# Altium PCB MultiRotor.PcbDoc
Units mil, origin at the board's own origin, x right, y up, seen from the top; angles counter-clockwise.
Board outline 1840 x 1456 mil, 2 copper layers (Top Layer, Bottom Layer); 44 components, 42 nets, 162 pads, 12 vias.
Unrouted connection lines stored in the file: 10.
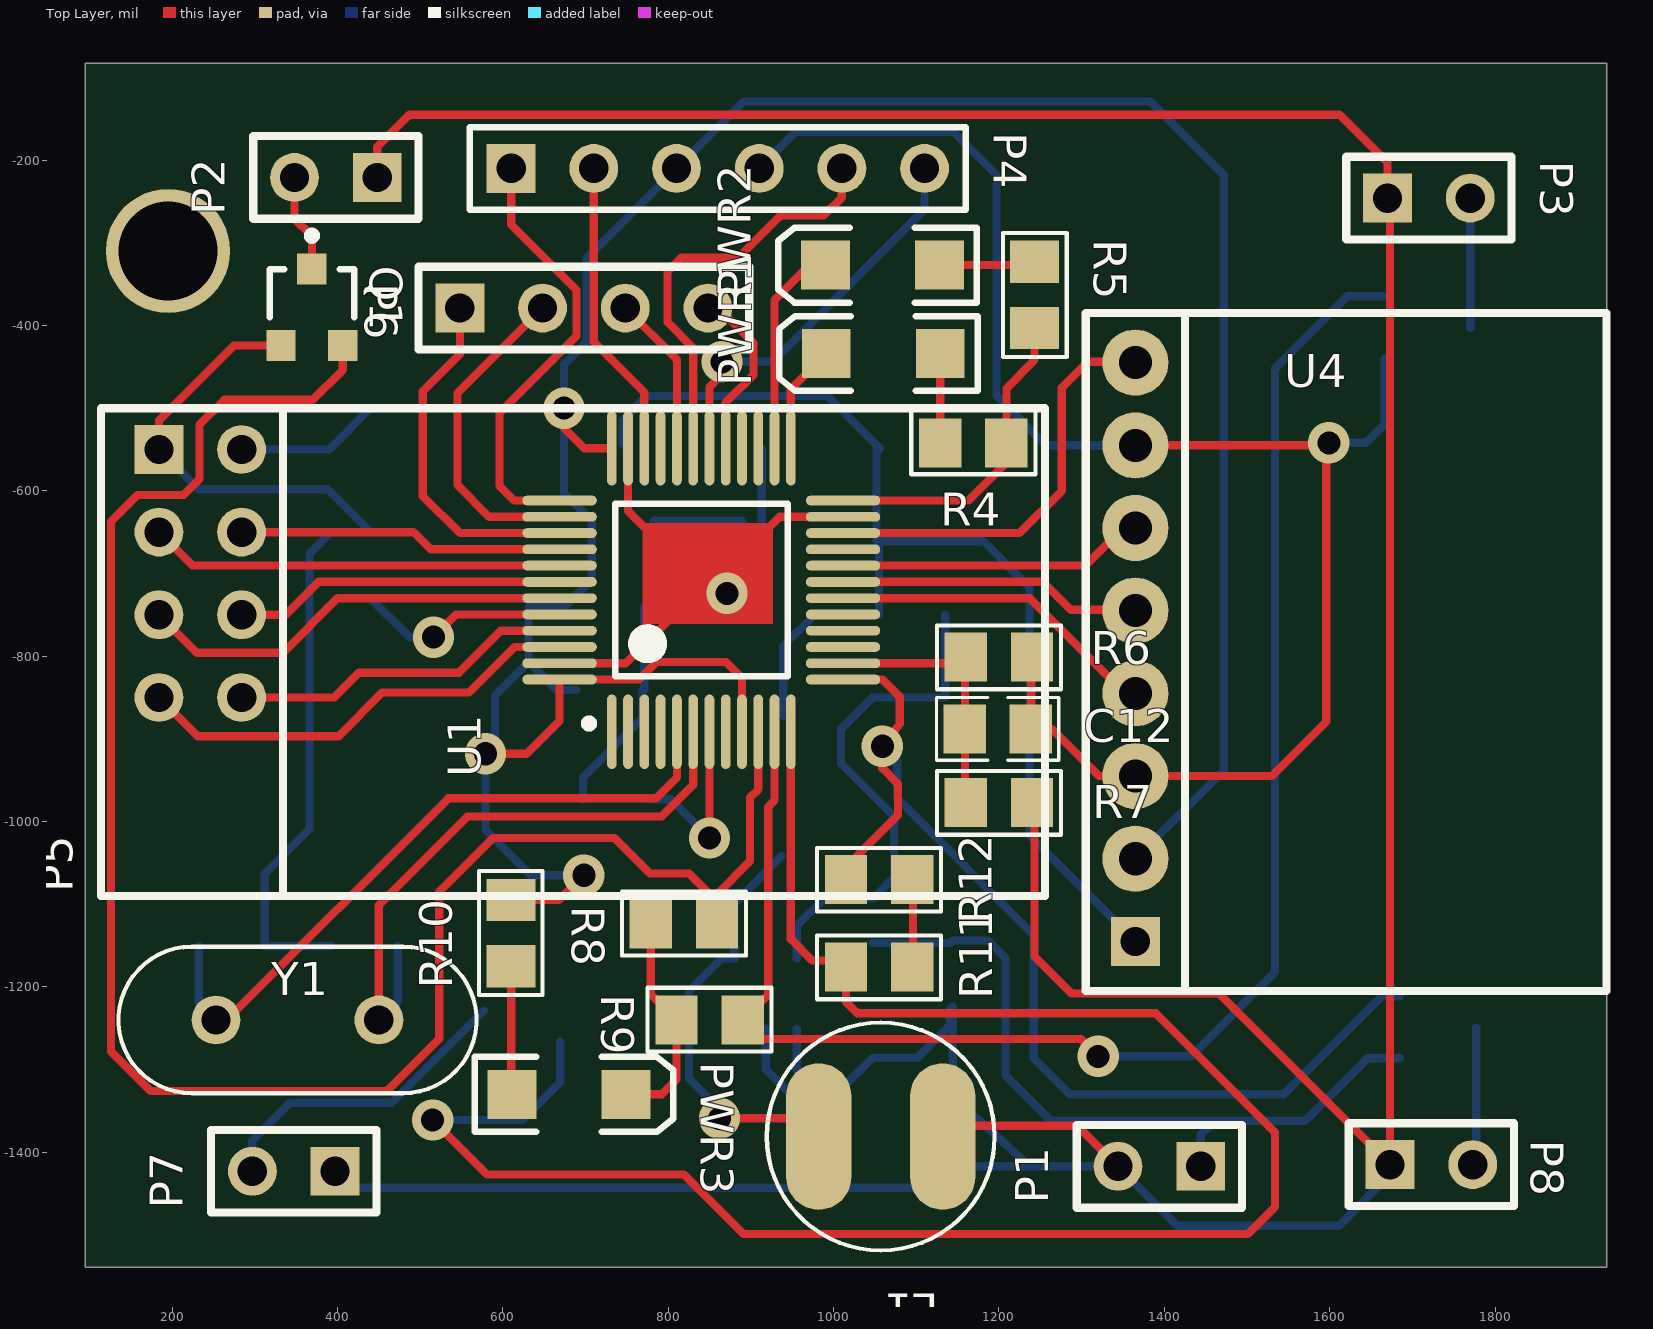
[diagram p0: Top Layer view]
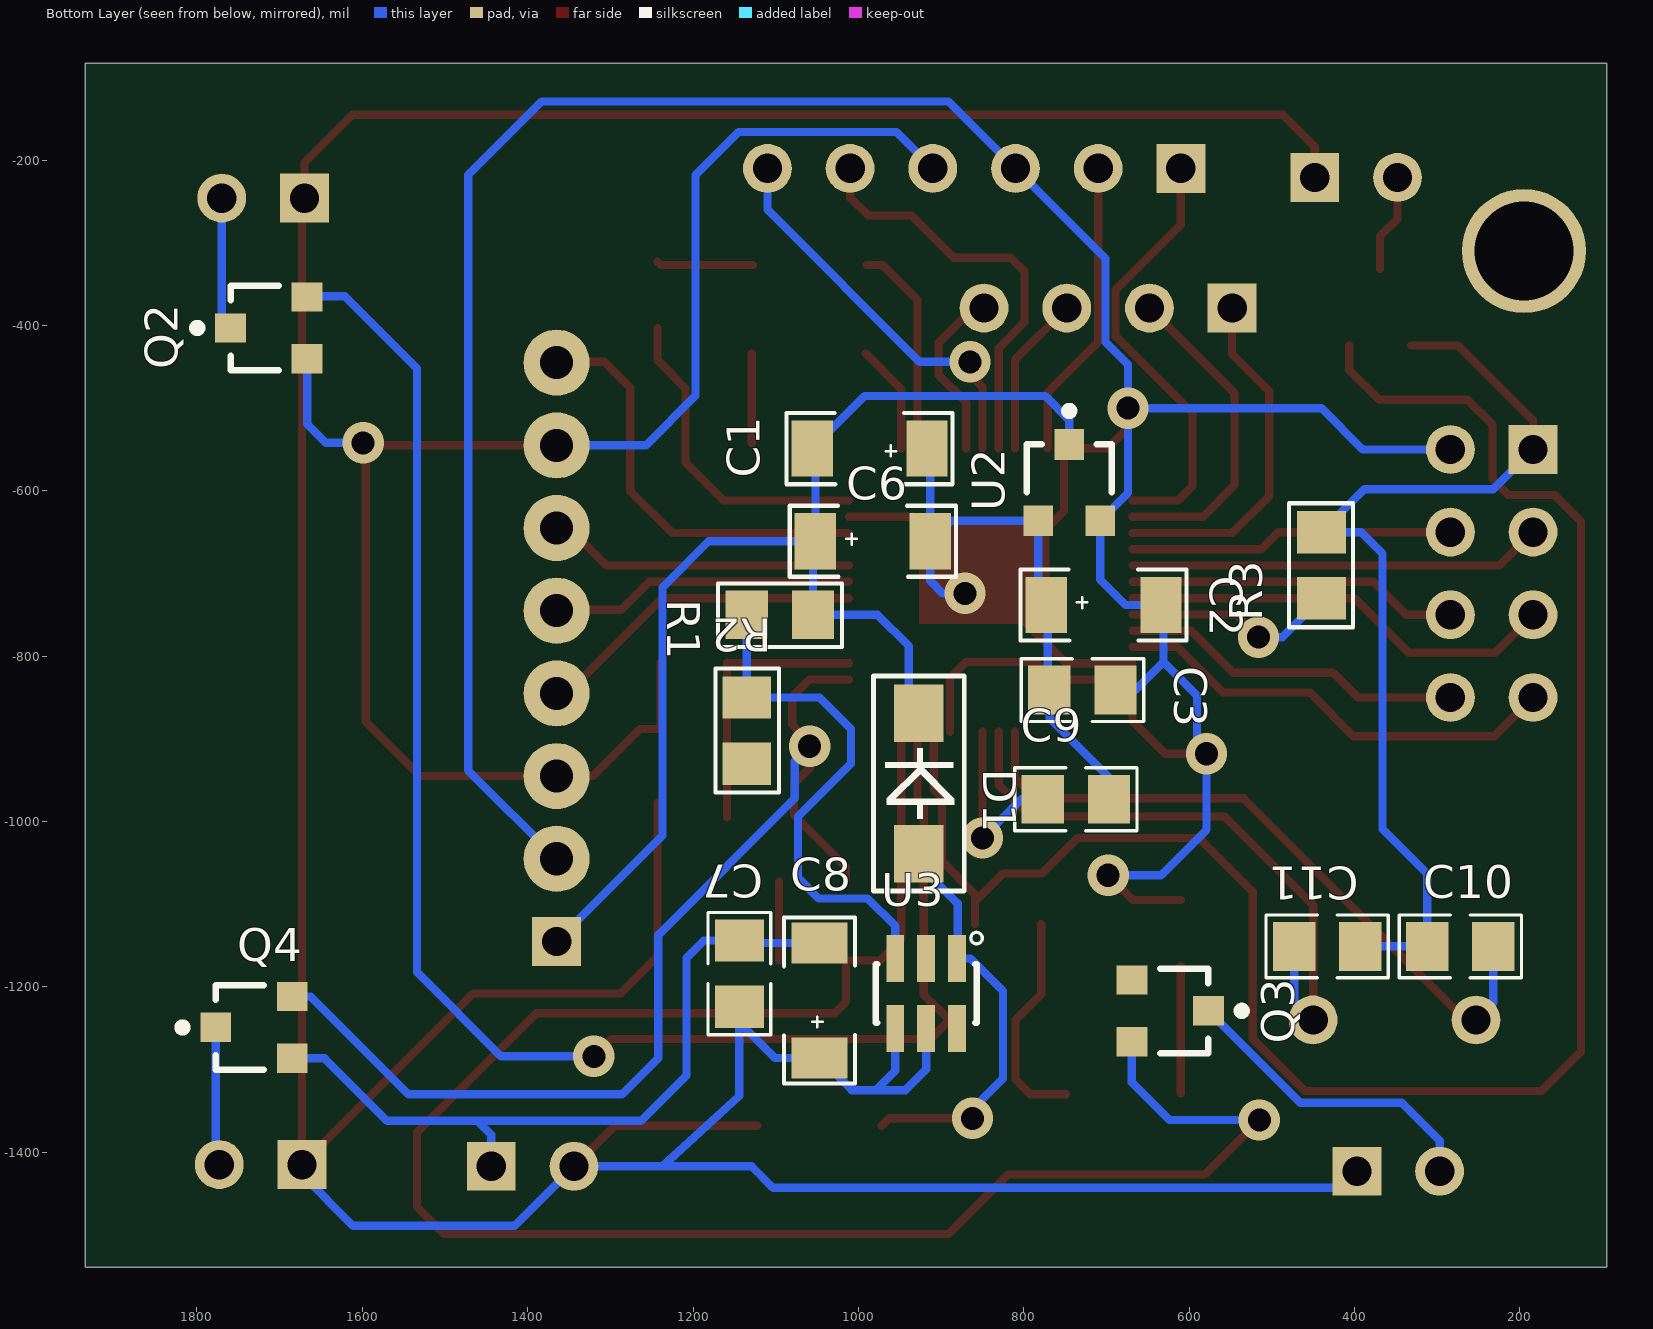
[diagram p1: Bottom Layer view, seen from below]

## Layer stack, top to bottom
Top Solder: solder mask 0.4, Solder Resist, Dk 3.5
Top Layer: signal copper 1.4
Dielectric1: dielectric 12.6, FR-4, Dk 4.8
Bottom Layer: signal copper 1.4
Bottom Solder: solder mask 0.4, Solder Resist, Dk 3.5

## Board outline
95,-83 1935,-83 1935,-1539 95,-1539

## Design rules (kind name [scope] priority, off if disabled: settings)
Clearance [All] p1 off: gap=10
PlaneClearance [All] p1: clearance=30
PolygonConnect [All] p1: connectstyle=Relief reliefconductorwidth=10 reliefentries=4 polygonreliefangle="90 Angle" airgapwidth=10
RoutingVias [All] p1: holewidth=28 width=50 viastyle="Through Hole" minholewidth=28 minwidth=50 maxholewidth=28 maxwidth=50
SilkToSolderMaskClearance SilkscreenOverComponentPads [IsPad] p1: minsilkscreentomaskgap=10 clearancetoexposedcopper=TRUE
SolderMaskExpansion [All] p1: expansion=4
Width [All] p1: maxlimit=40 minlimit=10 preferedwidth=10
28 further rules are at their usual default settings.

## Classes and differential pairs
net class POWER: GND VCC3.3 VCC3.7 VCC5

## Components (designator, comment, footprint, x,y, rotation, side; value= is the part's Value field where it differs from the comment)
C1 "Cap Pol1" CAP[1206] 984,-549 r0 bottom
C2 "Cap Pol1" CAP[1206] 706,-738 r180 bottom
C3 "Cap" CAP[0805] 728,-842 r180 bottom
C6 "Cap" CAP[1206] 985,-661 r180 bottom
C7 "Cap" CAP[0805] 1145,-1185 r270 bottom
C8 "Cap" CAP[1206] 1047,-1219 r90 bottom
C9 "Cap" CAP[0805] 736,-974 r180 bottom
C10 "Cap" CAP[0805] 273,-1150 r0 bottom
C11 "Cap" CAP[0805] 432,-1152 r180 bottom
C12 "Cap" CAP[0805] 1197.5,-887 r180 top
D1 "1n5819" "DO-214AC - Diode" 927,-1039 r90 bottom
L1 "Inductor" Inductor_T10uH 1057,-1381 r180 top
P1 "Header 2" H2.54-1X2 1394,-1417 r180 top
P2 "Header 2" H2.54-1X2 398,-221 r180 top
P3 "Header 2" H2.54-1X2 1720,-246 r0 top
P4 "SIP+串口" HDR1X6 610,-210 r0 top
P5 "NRF2401" NRF(2401)模块 184,-550 r90 top
P6 "遥控接收PWM信号" H2.54-1X4 698,-379 r0 top
P7 "Header 2" H2.54-1X2 347,-1423 r180 top
P8 "Header 2" H2.54-1X2 1723,-1415 r0 top
PWR1 "LED2" 3.2X1.6X1.1 1060,-434 r180 top
PWR2 "LED2" 3.2X1.6X1.1 1059,-327 r180 top
PWR3 "LED2" 3.2X1.6X1.1 680,-1330 r0 top
Q1 "MOSFET-N" SOT23 369,-378 r0 top
Q2 "MOSFET-N" SOT23 1713,-403 r90 bottom
Q3 "MOSFET-N" SOT23 623,-1229 r270 bottom
Q4 "MOSFET-N" SOT23 1731,-1249 r90 bottom
R1 "Res1" RES[0805] 1095,-750 r0 bottom
R2 "Res1" RES[0805] 1135,-890 r270 bottom
R3 "Res1" RES[0805] 440,-690 r90 bottom
R4 "Res1" RES[0805] 1169,-542 r0 top
R5 "Res1" RES[0805] 1243,-363 r270 top
R6 "Res1" RES[0805] 1200,-801 r180 top
R7 "Res1" RES[0805] 1200,-977 r180 top
R8 "Res1" RES[0805] 819,-1124 r0 top
R9 "Res1" RES[0805] 850,-1240 r0 top
R10 "Res1" RES[0805] 610,-1135 r90 top
R11 "Res1" RES[0805] 1055,-1176 r180 top
R12 "Res1" RES[0805] 1055,-1070 r180 top
U1 "STM32F103C8T6" LQFP-48 840,-720 r90 top
U2 "662K" SOT23 745,-590 r180 bottom
U3 "CS3692" SOT23-6 918,-1208 r180 bottom
U4 "GY-88模块" MPU-6050 1365,-1145 r90 top
Y1 "XTAL" XTAL 350,-1240 r0 top

## Footprints (in the part's own frame and the unit in brackets; to place one, negate y for a bottom-side part, rotate by r counter-clockwise, add the part's x,y. Pads: shape width x height; smd on the part's side, far side on the other; paste and mask are expansions set on the pad)
3.2X1.6X1.1 [mm] "SMT LED; 2 Flat Leads"
  rect 1.5x1.5 smd: 1(-1.75,0) 2(1.75,0)
  silkscreen extent -2.9,-1.15 3.2,1.15
CAP[0805] [mil]
  rect 51.18x59.06 smd: 1(-41,1) 2(39,1)
  silkscreen extent -75,-37 73,39
CAP[1206] [mil]
  rect 50x68 smd: 1(-67,0) 2(72,0)
  silkscreen extent -98,-43 103,43, body extent -63,-31 63,32, height 63
"DO-214AC - Diode" [mil]
  rect 70x60 smd: 1(0,0) 2(170,0)
  silkscreen extent -45,-55 215,55
H2.54-1X2 [mm]
  rect 1.5x1.5 hole 0.9: 1(-1.27,0)
  round 1.5 hole 0.9: 2(1.27,0)
  silkscreen extent -2.54,-1.27 2.54,1.27
H2.54-1X4 [mm]
  rect 1.5x1.5 hole 0.9: 1(-3.81,0)
  round 1.5 hole 0.9: 2(-1.27,0) 3(1.27,0) 4(3.81,0)
  silkscreen extent -5.08,-1.27 5.08,1.27
HDR1X6 [mm] "Connector; Header; 6 Position"
  rect 1.5x1.5 hole 0.9: 1(0,0)
  round 1.5 hole 0.9: 2(2.54,0) 3(5.08,0) 4(7.62,0) 5(10.16,0) 6(12.7,0)
  silkscreen extent -1.27,-1.27 13.97,1.27
Inductor_T10uH [mm]
  oval 2x4.5 smd: 1(-1.905,0) 2(1.905,0)
  silkscreen extent -3.5,-3.5 3.5,3.5, body extent -3.51,-3.51 3.51,3.51, height 6.35
LQFP-48 [mm]
  oval 2.286x0.3 smd: 1(-4.354,2.75) 2(-4.354,2.25) 3(-4.354,1.75) 4(-4.354,1.25) 5(-4.354,0.75) 6(-4.354,0.25) 7(-4.354,-0.25) 8(-4.354,-0.75) 9(-4.354,-1.25) 10(-4.354,-1.75) 11(-4.354,-2.25) 12(-4.354,-2.75) 25(4.354,-2.75) 26(4.354,-2.25) 27(4.354,-1.75) 28(4.354,-1.25) 29(4.354,-0.75) 30(4.354,-0.25) 31(4.354,0.25) 32(4.354,0.75) 33(4.354,1.25) 34(4.354,1.75) 35(4.354,2.25) 36(4.354,2.75)
  oval 0.3x2.286 smd: 13(-2.75,-4.354) 14(-2.25,-4.354) 15(-1.75,-4.354) 16(-1.25,-4.354) 17(-0.75,-4.354) 18(-0.25,-4.354) 19(0.25,-4.354) 20(0.75,-4.354) 21(1.25,-4.354) 22(1.75,-4.354) 23(2.25,-4.354) 24(2.75,-4.354) 37(2.75,4.354) 38(2.25,4.354) 39(1.75,4.354) 40(1.25,4.354) 41(0.75,4.354) 42(0.25,4.354) 43(-0.25,4.354) 44(-0.75,4.354) 45(-1.25,4.354) 46(-1.75,4.354) 47(-2.25,4.354) 48(-2.75,4.354)
  silkscreen extent -4.22,-2.65 2.65,3.57, body extent -3.5,-3.5 3.5,3.5, height 1.6
MPU-6050 [mil]
  rect 59.06x59.06 hole 35.43: 1(0,0)
  round 80 hole 40: 2(100,0) 3(200,0) 4(300,0) 5(400,0) 6(500,0) 7(600,0) 8(700,0)
  silkscreen extent -60,-570 760,60, body extent -50,-50 750,50, height 336
NRF(2401)模块 [mm]
  rect 1.5x1.5 hole 0.9: 1(0,0)
  round 1.5 hole 0.9: 2(0,-2.54) 3(-2.54,0) 4(-2.54,-2.54) 5(-5.08,0) 6(-5.08,-2.54) 7(-7.62,0) 8(-7.62,-2.54)
  silkscreen extent -13.72,-27.22 1.27,1.78
RES[0805] [mm]
  rect 1.3x1.5 smd: 1(-1.016,0) 2(1.016,0)
  silkscreen extent -1.91,-0.97 1.91,0.99
SOT23 [mm] "SOT-23; 3 Leads; Body 3.1 x 2.5 mm, inc. leads (LxW max), Alternate Lead Configuration"
  rect 0.9x0.95 smd: 1(0,1.175) 2(0.95,-1.175) 3(-0.95,-1.175)
  silkscreen extent -1.3,-0.3 1.3,2.32
SOT23-6 [mm] "SOT-23/SC-74A; 5 Leads; Body 3.1 x 3 mm, inc. leads (LxW max)"
  rect 0.55x1.45 smd: 1(0.95,1.075) 2(0,1.075) 3(-0.95,1.075) 4(-0.95,-1.075) 5(0,-1.075) 6(0.95,-1.075)
  silkscreen extent -1.55,-0.9 1.72,1.88, body extent -1.4,-1.19 1.4,1.23, height 1.08
XTAL [mm]
  round 1.5 hole 0.9: 1(-2.465,-0.002) 2(2.54,0)
  silkscreen extent -5.46,-2.25 5.54,2.25

## Part data
C1 C2: library part Cap, "Capacitor"
C3 C7 C9 C10 C11 C12: "Capacitor"
C6 C8: library part "Cap Pol1", "Polarized Capacitor (Radial)"
D1: library part Diode_P6KE, "Diode_P6KE"
P1 P2 P3 P7 P8: "Header, 2-Pin"
P4: library part "Header 6", "Header, 6-Pin"
P5: library part "Header 4X2", "Header, 4-Pin, Dual ro"
P6: library part "Header 4", "Header, 4-Pin"
PWR1 PWR2 PWR3: "Typical RED, GREEN, YELLOW, AMBER GaAs LED"
Q1 Q2 Q3 Q4: "N-Channel MOSFET"
R1 R2 R3 R4 R5 R6 R7 R8 R9 R10 R11 R12: "Resistor"
U1: "STM32 ARM-based 32-bit MCU with 64 Kbytes Flash, 48-pin LQFP, Industrial Temperature"
U2: library part AMS1117-3.3
U3: "Generic Phase Locked Loop"
U4: library part MPU-6050ģ?
Y1: "Crystal Oscillator"

## Free pads (board coordinates)
  round 150 hole 120: 0(195,-310)

## Via types
v1: diameter 50, hole 28, Top Layer to Bottom Layer, 12 vias

## Nets (pads, with @x,y where several pads share a name; then routed paths per layer and width w, separated by ;. In a path a pad name is that pad's centre, name@x,y a point inside that pad or via, vN(x,y) a via of type N, cw(c..) or ccw(c..) an arc to the next point about the centre after c; other vN are vias at no path point)
BAT_CHECK: C12.2 R6.2 R7.2 U1.14 | length 334.8
  Top Layer w10: U1.14 1158.42,-808.58 1159,-808 1159,-905 R7.2@1159,-995
CE: P5.3 U1.41 | length 501.3
  Top Layer w10: P5.3 224.47,-690.47 U1.41
CSN: P5.4 U1.40 | length 393.2
  Top Layer w10: P5.4 492,-650 512.79,-670.79 U1.40
G_INT: U1.22 U4.8 | length 498.6
  Top Layer w10: U1.22 1224.9,-651.1 1276,-600 1276,-475 1307,-444 U4.8@1351,-444
GND: C1.1 C2.1 C3.1 C6.2 C7.1 C8.2 C9.2 C10.2 C11.2 C12.1 P1.1 P4.4 P5.1 PWR3.2 Q1.3 Q2.3 Q3.3 Q4.3 R2.2 R3.2 R6.1 R8.1 R9.1 R11.1 R12.1 U1.8 U1.23 U1.35 U1.47 U2.3 U3.2 U4.3 U4.7 | length 5655.5
  Top Layer w10: P5.1 184,-515 274.74,-424.26 Q1.3 ; U1.47 748.42,-808.58 831,-726 ; PWR3.2 792,-1330 810,-1312 R9.1 779,-1209 R8.1 ; U1.35 751.42,-624.42 791,-664 ; 892,-674 934.58,-631.42 U1.23 ; R11.1@1096,-1168 R12.1@1096,-1073 ; C12.1 C12.1@1239,-888 ; R6.1@1239,-808 C12.1@1239,-888 ; U4.7 1596,-545 1596,-879 1530,-945 U4.3 1321,-945 1264,-888 C12.1@1239,-888
  Bottom Layer w10: P5.1 232,-598 388,-598 R3.2 392,-650 366,-676 366,-1009 312,-1063 C10.2 C11.2 ; C9.2 697,-947 769,-875 C3.1 ; C3.1@771,-841 771,-740 C2.1 782.4,-728.6 U2.3 888.26,-636.26 C6.2 ; v1(871,-724) 898,-724 913,-709 C6.2 ; P4.4 954,-166 1145,-166 1197,-218 1197,-485 1257,-545 U4.7 ; C1.1@913,-549 C6.2 ; C8.2 1141,-1147 C7.1 1187,-1144 1208,-1165 1208,-1307 1263,-1362 1461,-1362 ; P1.1@1428,-1401 P1.1 1444,-1379 1461,-1362 ; v1(1599,-542) 1644,-542 1666.74,-519.26 Q2.3 ; Q4.3 1645.6,-1286.4 1570,-1362 1461,-1362
LED1: PWR1.2 U1.25 | length 132.3
  Top Layer w10: U1.25 948.27,-476.83 PWR1.2
LED2: PWR2.2 U1.26 | length 258.3
  Top Layer w10: U1.26 928.58,-369.42 971,-327 PWR2.2
M_DRDY: U1.20 U4.6 | length 358.8
  Top Layer w10: U1.20 1304.53,-690.47 U4.6@1351,-644
MISO: P5.7 U1.46 | length 548.8
  Top Layer w10: P5.7 231,-897 401,-897 454,-844 559,-844 614.1,-788.9 U1.46
MOSI: P5.6 U1.42 | length 401.1
  Top Layer w10: P5.6 337,-750 376.84,-710.16 U1.42
NetC9_1: C9.1 U1.7 | length 221.1
  Top Layer w10: U1.7 849.84,-1019.84 v1(850,-1020)
  Bottom Layer w10: C9.1 803,-973 v1(850,-1020)
NetC10_1: C10.1 U1.5 Y1.1 | length 832
  Top Layer w10: Y1.1 265.91,-1240.09 534,-972 785,-972 810.47,-946.53 U1.5
  Bottom Layer w10: C10.1 232,-1219.13 Y1.1
NetC11_1: C11.1 U1.6 Y1.2 | length 742.2
  Top Layer w10: Y1.2 450,-1101 557,-994 792,-994 830.16,-955.84 U1.6
  Bottom Layer w10: Y1.2 473,-1217 C11.1
NetD1_1: D1.1 L1.2 U3.1 | length 522.5
  Top Layer w10: v1@862,-1374 v1(862,-1359) 963,-1359 L1.2@972,-1368
  Bottom Layer w10: v1@862,-1364 v1(862,-1359) 862,-1348 825,-1311 825,-1205 864.32,-1165.68 U3.1 880,-1165.08 880,-1099 D1.1@937,-1042
NetP2_2: P2.2 Q1.1 | length 119.4
  Top Layer w10: P2.2 348,-271 369,-292 Q1.1
NetP3_2: P3.2 Q2.1 | length 157
  Bottom Layer w10: Q2.1@1770,-403 P3.2
NetP7_2: P7.2 Q3.1 | length 381.8
  Bottom Layer w10: P7.2 297,-1386 343,-1340 465.74,-1340 Q3.1
NetP8_2: P8.2 Q4.1 | length 176.8
  Bottom Layer w10: P8.2@1773,-1410 1773,-1417 1777.26,-1412.74 Q4.1
NetPWR1_1: PWR1.1 R4.1 | length 108
  Top Layer w10: PWR1.1 1128.9,-541.9 R4.1
NetPWR2_1: PWR2.1 R5.1 | length 116.8
  Top Layer w10: PWR2.1 1239,-327 R5.1
NetPWR3_1: PWR3.1 R10.1 | length 153.9
  Top Layer w10: PWR3.1@610,-1328.9 R10.1
NetR1_2: R1.2 R2.1 U3.3 | length 629.2
  Bottom Layer w10: U3.3 955.4,-1126.6 989,-1093 1048,-1093 1073,-1068 1073,-994 1009,-930 1009,-888 1047,-850 R2.1 R1.2
NetR3_1: R3.1 U1.44 | length 259.4
  Top Layer w10: v1(516,-777) 543.47,-749.53 U1.44
  Bottom Layer w10: R3.1 487,-777 v1(516,-777)
NRF_IRQ: P5.8 U1.45 | length 418
  Top Layer w10: P5.8 396,-850 426,-820 547,-820 597.79,-769.21 U1.45
PWMA: Q1.2 R8.2 U1.10 | length 2361.4
  Top Layer w10: Q1.2 406.4,-453.6 370,-490 263,-490 233,-520 233,-586 214,-605 158,-605 126,-637 126,-1278 174,-1326 460,-1326 523,-1263 523,-1085 588,-1020 735,-1020 778,-1063 825,-1063 859,-1097 R8.2 859,-1088 899,-1048 899,-971 908.9,-961.1 U1.10
PWMB: Q2.2 R9.2 U1.11 | length 1965
  Top Layer w10: U1.11 928.58,-974.42 921,-982 921,-1209 R9.2 913,-1263 1299,-1263 v1(1320,-1284)
  Bottom Layer w10: v1(1320,-1284) 1432,-1284 1534,-1182 1534,-452 1621.4,-364.6 Q2.2@1663.74,-364.6
PWMC: Q3.2 R11.2 U1.12 | length 2357.9
  Top Layer w10: v1(515,-1361) 581,-1427 819,-1427 891,-1499 1501,-1499 1534,-1466 1534,-1376 1390,-1232 1029,-1232 1015,-1218 R11.2 ; U1.12 948.27,-1142.27 974,-1168 R11.2@1016,-1168
  Bottom Layer w10: v1(515,-1361) 624,-1361 669.26,-1315.74 Q3.2
PWMD: Q4.2 R12.2 U1.13 | length 1302.2
  Top Layer w10: U1.13 1059.27,-828.27 1080,-849 1080,-882 v1(1059,-909) 1059,-935.5 1078,-954.5 1078,-992 1015,-1055 R12.2
  Bottom Layer w10: v1(1059,-909) 1077,-927 1077,-972 1242,-1137 1242,-1286 1286,-1330 1544,-1330 1662.4,-1211.6 Q4.2
SCK: P5.5 U1.43 | length 531
  Top Layer w10: P5.5 230,-796 334,-796 400.16,-729.84 U1.43
SCL: U1.18 U4.4 | length 386.9
  Top Layer w10: U1.18 1236.84,-729.84 U4.4@1351,-844
SDA: U1.19 U4.5 | length 353.6
  Top Layer w10: U1.19 1253.16,-710.16 1287,-744 U4.5@1351,-744
SWCLK: P4.1 U1.37 | length 535.2
  Top Layer w10: P4.1 610,-278 689,-357 689,-413 596,-506 596,-594 613.73,-611.73 U1.37
SWDIO: P4.2 U1.34 | length 363.9
  Top Layer w10: P4.2 710,-420 771.1,-481.1 U1.34
TIM1_1_D: P6.4 U1.29 | length 213.8
  Top Layer w10: P6.4 861,-379 903,-421 903,-460 869.53,-493.47 U1.29
TIM1_4_C: P6.3 U1.32 | length 195.5
  Top Layer w10: P6.3 810.47,-441.47 U1.32
TIM2_1_B: P6.2 U1.38 | length 396.2
  Top Layer w10: P6.2 545,-482 545,-593 583.42,-631.42 U1.38
TIM2_2_A: P6.1 U1.39 | length 429.9
  Top Layer w10: P6.1 548,-434.75 503,-479.75 503,-606 548.1,-651.1 U1.39
USART1_RX: P4.5 U1.31 | length 509.8
  Top Layer w10: U1.31 830.16,-427.16 799,-396 799,-335 816,-318 885,-318 936,-267 988,-267 1010,-245 P4.5
USART1_TX: P4.6 U1.30 | length 482.1
  Top Layer w10: U1.30 849.84,-474.16 865,-459 v1(865,-444)
  Bottom Layer w10: v1(865,-444) 926,-444 1110,-260 P4.6
VCC3.3: C2.2 C3.2 P4.3 P5.2 R4.2 R5.2 R10.2 U1.9 U1.24 U1.36 U1.48 U2.2 U4.2 | length 4196.4
  Top Layer w10: v1(579,-918) 629,-918 668.58,-878.42 U1.48 764.73,-828.27 786,-807 870,-807 889.21,-826.21 U1.9 ; R10.2 668,-1095 v1(698,-1065) ; v1(674,-500) 674,-524 698.58,-548.58 U1.36 ; U1.24 1163.27,-611.73 1209,-566 R4.2 1209,-476 1243,-442 R5.2
  Bottom Layer w10: P5.2 390,-550 440,-500 v1(674,-500) ; v1(579,-918) 579,-1010 634,-1065 v1(698,-1065) ; v1@590.5,-897.5 590.5,-847.5 631,-807 ; C3.2 665,-841 631,-807 ; U4.2 1472,-938 1472,-218 1383,-129 891,-129 P4.3 701,-319 701,-420 674,-447 v1(674,-500) ; 631,-807 631,-741 C2.2 677,-738 707.6,-707.4 U2.2 674,-602.66 v1(674,-500)
VCC3.7: C7.2 C8.1 L1.1 P1.2 P2.1 P3.1 P7.1 P8.1 R7.1 U3.4 U3.5 | length 5514.1
  Top Layer w10: P2.1 448,-184 487,-145 1612,-145 1670,-203 P3.1 1673,-249 P8.1 1466,-1208 1288,-1208 1243,-1163 R7.1@1243,-977 ; L1.1@1122,-1368 1295,-1368 P1.2 P1.2@1344,-1398
  Bottom Layer w10: P7.1 417,-1443 1103,-1443 1129,-1417 1237,-1417 ; U3.5 918,-1300 943,-1325 979,-1325 ; U3.4 955.4,-1301.4 979,-1325 ; P8.1 1673,-1427 1611,-1489 1416,-1489 P1.2 1237,-1417 ; 979,-1325 1008,-1325 C8.1 1101,-1286 1141,-1246 1141,-1227 C7.2 1144,-1332 1237,-1417
VCC5: C1.2 C6.1 D1.2 R1.1 U2.1 U4.1 | length 1485.8
  Bottom Layer w10: U2.1 745,-514.43 774,-485.43 992.43,-485.43 C1.2 ; D1.2@939,-872 939,-788 977,-750 R1.1 1055,-664 C6.1 ; C1.2@1052,-549 C6.1 ; U4.1 1237,-1017 1237,-717 1181,-661 C6.1
pads on no net: U1.1 U1.2 U1.3 U1.4 U1.15 U1.16 U1.17 U1.21 U1.27 U1.28 U1.33 U3.6

## Other copper
Top Layer:
  rectangle net GND: 769,-761 927,-639